# Altium PCB UNIT.PcbDoc
Units mil, origin at the board's own origin, x right, y up, seen from the top; angles counter-clockwise.
Board outline 6000 x 4000 mil, 2 copper layers (Top Layer, Bottom Layer); 58 components, 0 nets, 221 pads, 0 vias.
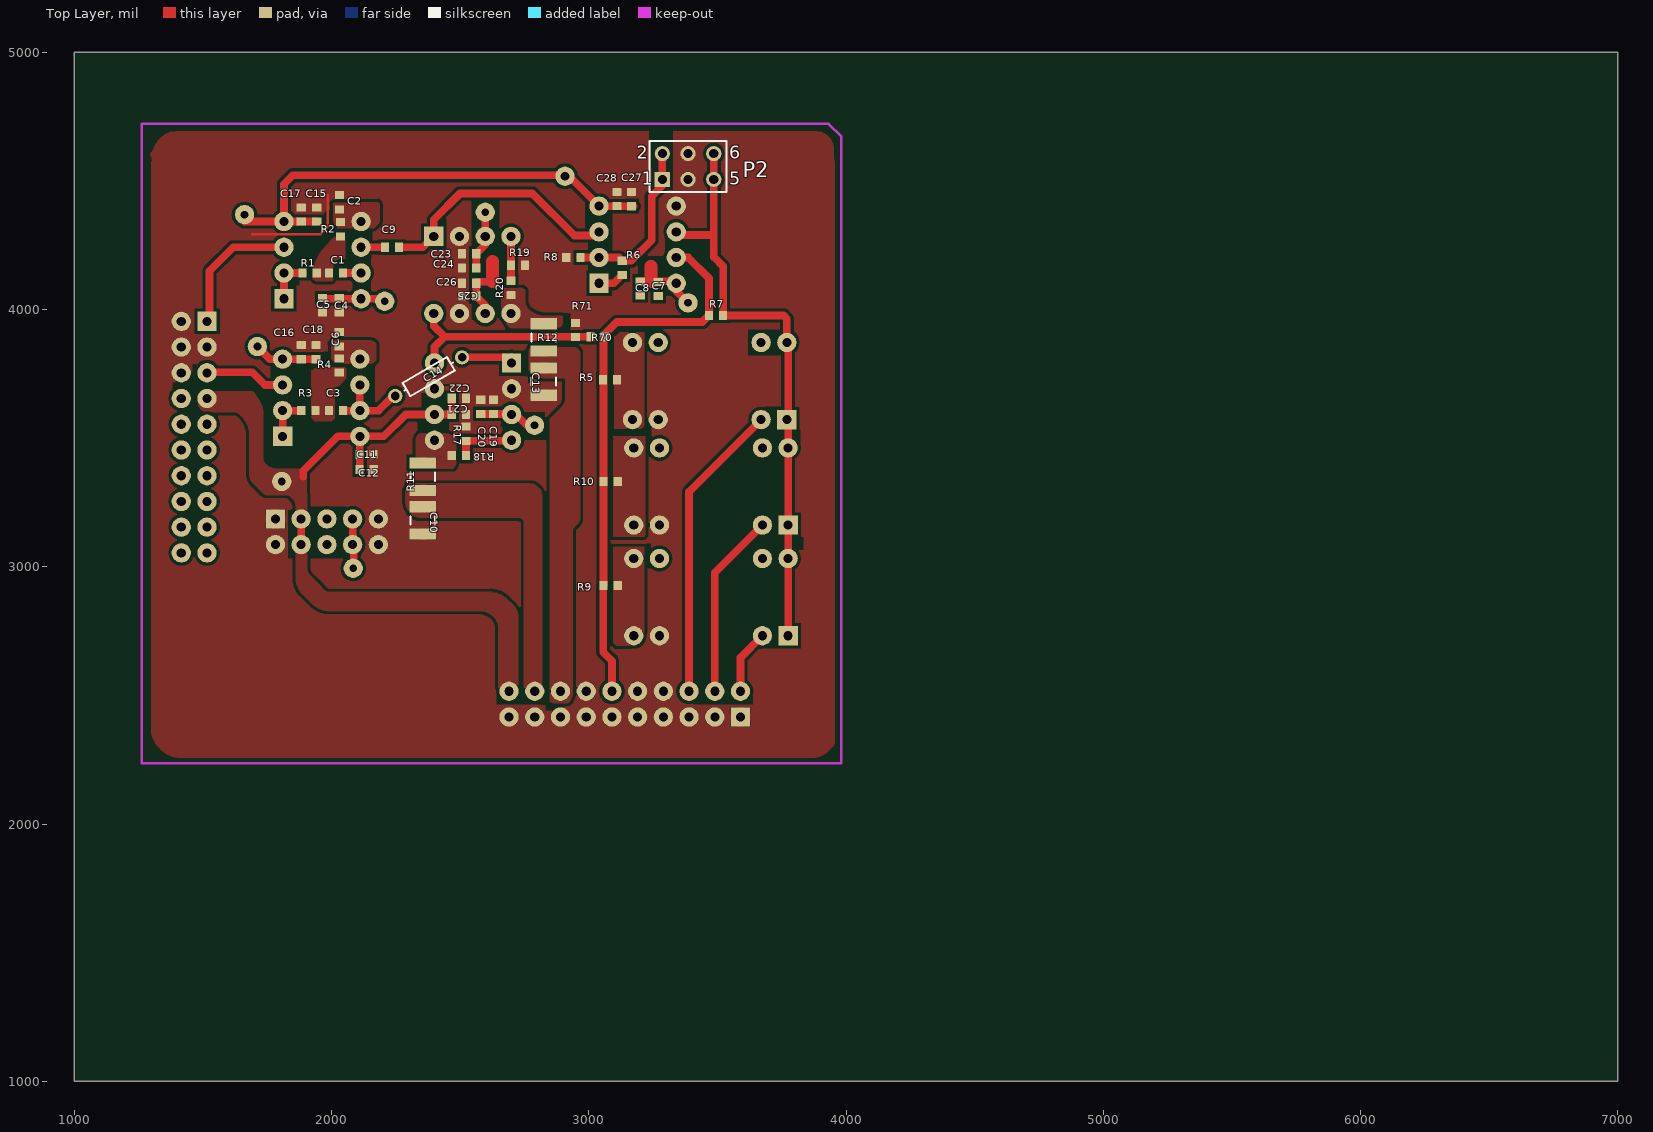
[diagram p0: Top Layer view]
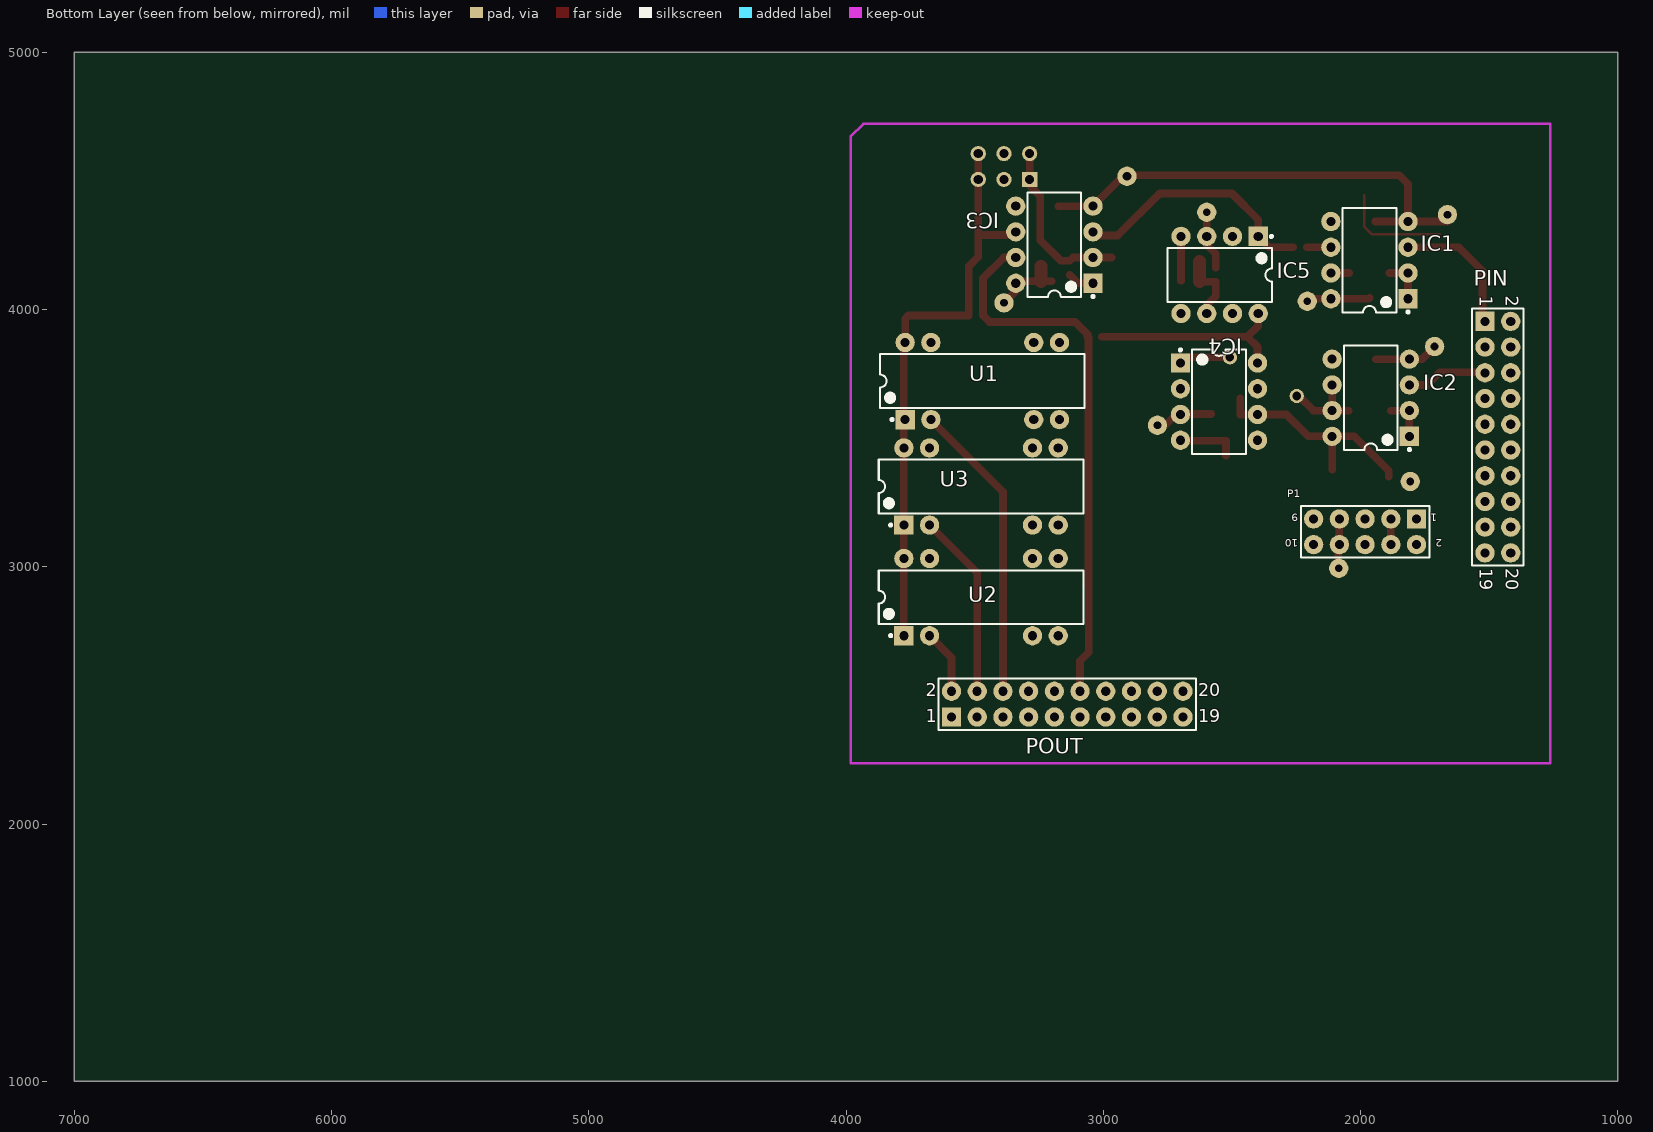
[diagram p1: Bottom Layer view, seen from below]

## Layer stack, top to bottom
Top Solder: solder mask 0.4, Solder Resist, Dk 3.5
Top Layer: signal copper 1.4
Dielectric 1: dielectric 12.6, FR-4, Dk 4.8
Bottom Layer: signal copper 1.4
Bottom Solder: solder mask 0.4, Solder Resist, Dk 3.5

## Board outline
1000,1000 7000,1000 7000,5000 1000,5000

## Design rules (kind name [scope] priority, off if disabled: settings)
Clearance [All] p1: gap=10 ignorepadtopadclearanceinfootprint=FALSE except(0: Arc-Hole Track-Hole SMDPad-Hole THPad-Hole Via-Hole Fill-Hole Poly-Hole Region-Hole Text-Hole)
PolygonConnect [All] p1: connectstyle=Relief reliefconductorwidth=10 reliefentries=4 polygonreliefangle="90 Angle" airgapwidth=10
RoutingVias [All] p1: holewidth=28 width=50 viastyle="Through Hole" minholewidth=28 minwidth=50 maxholewidth=28 maxwidth=50
SolderMaskExpansion [All] p1: expansion=4
Width [All] p1: maxlimit=10 minlimit=10 preferedwidth=10
30 further rules are at their usual default settings.

## Components (designator, comment, footprint, x,y, rotation, side; value= is the part's Value field where it differs from the comment)
C1 "Cap" 1608[0603] 2017.28,4142 r0 top value=10n
C2 "Cap" 1608[0603] 2031.25,4417 r270 top value=10n
C3 "Cap" 1608[0603] 2017.56,3607 r0 top value=10n
C4 "Cap" 1608[0603] 2030,4017 r270 top value=10nF
C5 "Cap" 1608[0603] 1965,4017 r270 top value=10uF
C6 "Cap" 1608[0603] 2030,3884.56 r270 top value=10n
C7 "Cap" 1608[0603] 3270,4079.44 r270 top value=10nF
C8 "Cap" 1608[0603] 3200,4082 r270 top value=10uF
C9 "Cap" 1608[0603] 2235,4242 r180 top value=1uF
C10 "Cap" C1210 2355.12,3180 r270 top value=1uF
C11 "Cap" 1608[0603] 2136,3436 r0 top value=10nF
C12 "Cap" 1608[0603] 2136.75,3378 r0 top value=10uF
C13 "Cap" C1210 2825,3720 r270 top value=1uF
C14 "Cap" AXIAL-0.3 2377.59,3738.96 r210 top value=1uF
C15 "Cap" 1608[0603] 1942.44,4369.44 r90 top value=10nF
C16 "Cap" 1608[0603] 1882.44,3834.44 r90 top value=10nF
C17 "Cap" 1608[0603] 1882.44,4369.44 r90 top value=10uF
C18 "Cap" 1608[0603] 1940,3834.44 r90 top value=10uF
C19 "Cap" 1608[0603] 2630,3621.84 r90 top value=10nF
C20 "Cap" 1608[0603] 2580,3621.84 r90 top value=10uF
C21 "Cap" 1608[0603] 2495,3592 r0 top value=10nF
C22 "Cap" 1608[0603] 2495,3655.31 r0 top value=10uF
C23 "Cap" 1608[0603] 2535,4217 r180 top value=10nF
C24 "Cap" 1608[0603] 2535,4162 r180 top value=10uF
C25 "Cap" 1608[0603] 2535,4052 r180 top value=10nF
C26 "Cap" 1608[0603] 2535,4102 r180 top value=10uF
C27 "Cap" 1608[0603] 3166,4428.95 r90 top value=10nF
C28 "Cap" 1608[0603] 3110,4429.44 r90 top value=10uF
IC1 "OPA2188AID" dip-8 1965,4192 r0 bottom
IC2 "OPA2188AID" dip-8 1960,3657 r0 bottom
IC3 "OPA2188AID" dip-8 3190,4252 r0 bottom
IC4 "AD835ARZ" DIP-8 2550,3642 r180 bottom
IC5 "AD835ARZ" DIP-8 2547.56,4134.44 r270 bottom
P1 "Header 5X2" HDR2X5 1782,3186 r0 bottom
P2 "Header 3X2" HDR2X3 3286,4506 r0 top
PIN "Header 10X2" HDR2X10 1516,3954 r270 bottom
POUT "Header 10X2" HDR2X10 3590,2416 r180 bottom
R1 "Res1" 1608[0603] 1914.88,4142 r0 top value=120
R2 "Res1" 1608[0603] 2035,4312 r90 top value=120
R3 "Res1" 1608[0603] 1910,3607 r0 top value=120
R4 "Res1" 1608[0603] 2030,3782 r90 top value=120
R5 "Res1" 1608[0603] 3082.56,3727 r180 top value=70
R6 "Res1" 1608[0603] 3130,4162 r270 top value=45K
R7 "Res1" 1608[0603] 3495,3977 r180 top value=500
R8 "Res1" 1608[0603] 2940,4202 r0 top value=10K
R9 "Res1" 1608[0603] 3085,2927 r180 top value=1
R10 "Res1" 1608[0603] 3085,3332 r180 top value=7
R11 "Res1" C1210 2355.12,3350.15 r270 top value=10K
R12 "Res1" C1210 2825,3891.41 r270 top value=10K
R17 "Res1" 1608[0603] 2522.44,3517 r270 top value=200
R18 "Res1" 1608[0603] 2495,3432 r180 top value=2K
R19 "Res1" 1608[0603] 2725,4172 r180 top value=200
R20 "Res1" 1608[0603] 2697.56,4084.44 r270 top value=2K
R70 "Res1" 1608[0603] 3033.56,3894 r0 top value=80K
R71 "Res1" 1608[0603] 2948,3920.81 r90 top value=20K
U1 "D1A050000" D1A050000 3770,3572 r90 bottom
U2 "D1A050000" D1A050000 3775,2732 r90 bottom
U3 "D1A050000" D1A050000 3775,3162 r90 bottom

## Footprints (in the part's own frame and the unit in brackets; to place one, negate y for a bottom-side part, rotate by r counter-clockwise, add the part's x,y. Pads: shape width x height; smd on the part's side, far side on the other; paste and mask are expansions set on the pad)
1608[0603] [mm] "Chip Capacitor, Body 1.6x0.8mm, IPC High Density"
  rect 0.8x0.9 smd: 1(-0.7,0) 2(0.7,0)
  body extent -0.87,-0.48 0.87,0.48, height 1.3
AXIAL-0.3 [mm] "Axial Device, Thru-Hole; 2 Leads; 0.3 in Pin Spacing"
  round 1.4 hole 0.85: 1(-3.81,0) 2(3.81,0)
  silkscreen extent -2.77,-0.76 2.77,0.76
C1210 [mm] "Chip Capacitor, Body 3.2x2.5mm, IPC High Density"
  rect 1.1x2.6 smd: 1(-1.35,0) 2(1.35,0)
  silkscreen extent -0.4,-1.2 0.4,1.2, body extent -1.7,-1.35 1.7,1.35, height 1.3
D1A050000 [mm]
  rect 1.905x1.905 hole 0.9: 1(0,0)
  round 1.905 hole 0.9: 2(0,-2.54) 6(0,-12.7) 7(0,-15.24) 8(7.62,-15.24) 9(7.62,-12.7) 13(7.62,-2.54) 14(7.62,0)
  silkscreen extent -0.12,-17.72 6.46,2.48, body extent 0.21,-17.72 7.41,2.48, height 5.08
dip-8 [mm] "DIP; 8 Leads; Row Spacing 7.62 mm; Pitch 2.54 mm"
  rect 1.905x1.905 hole 0.9: 1(-3.81,3.81)
  round 1.905 hole 0.9: 2(-3.81,1.27) 3(-3.81,-1.27) 4(-3.81,-3.81) 5(3.81,-3.81) 6(3.81,-1.27) 7(3.81,1.27) 8(3.81,3.81)
  silkscreen extent -3.93,-5.15 2.65,5.23, body extent -3.6,-5.15 3.6,5.15, height 5.08
DIP-8 [mm] "DIP; 8 Leads; Row Spacing 7.62 mm; Pitch 2.54 mm"
  rect 1.905x1.905 hole 0.9: 1(-3.81,3.81)
  round 1.905 hole 0.9: 2(-3.81,1.27) 3(-3.81,-1.27) 4(-3.81,-3.81) 5(3.81,-3.81) 6(3.81,-1.27) 7(3.81,1.27) 8(3.81,3.81)
  silkscreen extent -3.94,-5.15 2.65,5.23, body extent -3.6,-5.15 3.6,5.15, height 5.08
HDR2X3 [mm] "Connector; Header; 3x2 Position"
  rect 1.5x1.5 hole 0.9: 1(0,0)
  round 1.5 hole 0.9: 2(0,2.54) 3(2.54,0) 4(2.54,2.54) 5(5.08,0) 6(5.08,2.54)
  silkscreen extent -1.27,-1.27 6.35,3.81
HDR2X5 [mm] "Connector; Header; 5x2 Position"
  rect 1.905x1.905 hole 0.9: 1(0,0)
  round 1.905 hole 0.9: 2(0,2.54) 3(2.54,0) 4(2.54,2.54) 5(5.08,0) 6(5.08,2.54) 7(7.62,0) 8(7.62,2.54) 9(10.16,0) 10(10.16,2.54)
  silkscreen extent -1.27,-1.27 11.43,3.81
HDR2X10 [mm] "Connector; Header; 10x2 Position"
  rect 1.905x1.905 hole 0.9: 1(0,0)
  round 1.905 hole 0.9: 2(0,2.54) 3(2.54,0) 4(2.54,2.54) 5(5.08,0) 6(5.08,2.54) 7(7.62,0) 8(7.62,2.54) 9(10.16,0) 10(10.16,2.54) 11(12.7,0) 12(12.7,2.54) 13(15.24,0) 14(15.24,2.54) 15(17.78,0) 16(17.78,2.54) 17(20.32,0) 18(20.32,2.54) 19(22.86,0) 20(22.86,2.54)
  silkscreen extent -1.27,-1.27 24.13,3.81

## Part data
C1 C2 C3 C4 C5 C6 C7 C8 C9 C10 C11 C12 C13 C14 C15 C16 C17 C18 C19 C20 C21 C22 C23 C24 C25 C26 C27 C28: "Capacitor", LatestRevisionDate=17-Jul-2002, LatestRevisionNote="Re-released for DXP Platform.", PackageDescription="Radial Cap, Thru-Hole; 2 Leads; 0.3 in Pin Spacing", PackageReference=RAD-0.3, Published=8-Jun-2000, Publisher="Altium Limited"
IC1 IC2 IC3: "Integrated Circuit", Manufacturer_Name="Texas Instruments", Mouser Part Number=595-OPA2188AID, RS Part Number=8122568P, Datasheet Link=http://www.ti.com/lit/ds/symlink/opa2188.pdf, Height=1.75mm, Manufacturer_Part_Number=OPA2188AID, Mouser Price/Stock=https://www.mouser.com/Search/Refine.aspx?Keyword=595-OPA2188AID, RS Price/Stock=http://uk.rs-online.com/web/p/products/8122568P
IC4 IC5: "Integrated Circuit", Manufacturer_Name="Analog Devices", Mouser Part Number=584-AD835ARZ, RS Part Number=5236973, Datasheet Link=http://www.analog.com/static/imported-files/data_sheets/AD835.pdf, Height=1.75mm, Manufacturer_Part_Number=AD835ARZ, Mouser Price/Stock=https://www.mouser.com/Search/Refine.aspx?Keyword=584-AD835ARZ, RS Price/Stock=https://uk.rs-online.com/web/p/products/5236973
P1: "Header, 5-Pin, Dual row", LatestRevisionDate=17-Jul-2002, LatestRevisionNote="Re-released for DXP Platform.", Publisher="Altium Limited"
P2: "Header, 3-Pin, Dual row", LatestRevisionDate=17-Jul-2002, LatestRevisionNote="Re-released for DXP Platform.", Publisher="Altium Limited"
PIN POUT: "Header, 10-Pin, Dual row", LatestRevisionDate=17-Jul-2002, LatestRevisionNote="Re-released for DXP Platform.", Publisher="Altium Limited"
R1 R2 R3 R4 R5 R6 R7 R8 R9 R10 R11 R12 R17 R18 R19 R20 R70 R71: "Resistor", LatestRevisionDate=17-Jul-2002, LatestRevisionNote="Re-released for DXP Platform.", PackageDescription="Axial Device, Thru-Hole; 2 Leads; 0.3 in Pin Spacing", PackageReference=AXIAL-0.3, Published=8-Jun-2000, Publisher="Altium Limited"

## Free pads (board coordinates)
  round 75 hole 30: 2(1662,4368.75) 3(1711.8,3856) 4(3386,4026) 5(2206.67,4032) 6(2597.56,4378.02) 7(2789.35,3550) 9(2084.21,2994) 10(1806.54,3331.67)
  round 75 hole 33.46: 11(2907.8,4518)

## Nets (pads, with @x,y where several pads share a name; then routed paths per layer and width w, separated by ;. In a path a pad name is that pad's centre, name@x,y a point inside that pad or via, vN(x,y) a via of type N, cw(c..) or ccw(c..) an arc to the next point about the centre after c; other vN are vias at no path point)
pads on no net: C1.1 C1.2 C2.1 C2.2 C3.1 C3.2 C4.1 C4.2 C5.1 C5.2 C6.1 C6.2 C7.1 C7.2 C8.1 C8.2 C9.1 C9.2 C10.1 C10.2 C11.1 C11.2 C12.1 C12.2 C13.1 C13.2 C14.1 C14.2 C15.1 C15.2 C16.1 C16.2 C17.1 C17.2 C18.1 C18.2 C19.1 C19.2 C20.1 C20.2 C21.1 C21.2 C22.1 C22.2 C23.1 C23.2 C24.1 C24.2 C25.1 C25.2 C26.1 C26.2 C27.1 C27.2 C28.1 C28.2 IC1.1 IC1.2 IC1.3 IC1.4 IC1.5 IC1.6 IC1.7 IC1.8 IC2.1 IC2.2 IC2.3 IC2.4 IC2.5 IC2.6 IC2.7 IC2.8 IC3.1 IC3.2 IC3.3 IC3.4 IC3.5 IC3.6 IC3.7 IC3.8 IC4.1 IC4.2 IC4.3 IC4.4 IC4.5 IC4.6 IC4.7 IC4.8 IC5.1 IC5.2 IC5.3 IC5.4 IC5.5 IC5.6 IC5.7 IC5.8 P1.1 P1.2 P1.3 P1.4 P1.5 P1.6 P1.7 P1.8 P1.9 P1.10 P2.1 P2.2 P2.3 P2.4 P2.5 P2.6 PIN.1 PIN.2 PIN.3 PIN.4 PIN.5 PIN.6 PIN.7 PIN.8 PIN.9 PIN.10 PIN.11 PIN.12 PIN.13 PIN.14 PIN.15 PIN.16 PIN.17 PIN.18 PIN.19 PIN.20 POUT.1 POUT.2 POUT.3 POUT.4 POUT.5 POUT.6 POUT.7 POUT.8 POUT.9 POUT.10 POUT.11 POUT.12 POUT.13 POUT.14 POUT.15 POUT.16 POUT.17 POUT.18 POUT.19 POUT.20 R1.1 R1.2 R2.1 R2.2 R3.1 R3.2 R4.1 R4.2 R5.1 R5.2 R6.1 R6.2 R7.1 R7.2 R8.1 R8.2 R9.1 R9.2 R10.1 R10.2 R11.1 R11.2 R12.1 R12.2 R17.1 R17.2 R18.1 R18.2 R19.1 R19.2 R20.1 R20.2 R70.1 R70.2 R71.1 R71.2 U1.1 U1.2 U1.6 U1.7 U1.8 U1.9 U1.13 U1.14 U2.1 U2.2 U2.6 U2.7 U2.8 U2.9 U2.13 U2.14 U3.1 U3.2 U3.6 U3.7 U3.8 U3.9 U3.13 U3.14
copper on no net: | length 16420.4
  Top Layer w10: 1691.37,4292 1955.82,4292 1986,4322.18 1986,4444
  Top Layer w30: 1516,3754 1518,3756 1692,3756 1741,3707 1810,3707 ; 1516,3954 1526,3964 1526,4150 1618,4242 1815,4242 ; 1662,4368.75 1662,4342 1815,4342 ; 1711.8,3856 1760.8,3807 1810,3807 1810.12,3806.88 1882.44,3806.88 1940,3806.88 ; 1810,3507 1810,3607 1882.44,3607 ; 1815,4042 1815,4142 1887.32,4142 ; 1882,3086 1882,3186 ; 1890,3350.58 1890,3372.54 2024.46,3507 2110,3507 ; 1942.44,4341.88 1942.32,4342 1815,4342 ; 1965,4044.56 1967.56,4042 2115,4042 2206.67,4042 2206.67,4032 ; 2044.84,4142 2115,4142 ; 2045.12,3607 2110,3607 ; 2082,3186 2082,3086 2088,3086 2084.21,2994 ; 2109.19,3378 2110,3378.81 2110,3507 ; 2110,3707 2110,3607 ; 2115,4242 2207.44,4242 ; 2247.69,3663.96 2239.56,3663.96 2182.3,3606.71 2110,3606.71 2110,3607 ; 2262.56,4242 2355.12,4242 2397.56,4284.44 2397.56,4349.42 2499.34,4451.2 2780.28,4451.2 2943.48,4288 3026,4288 3040,4302 ; 2397.56,3794.44 2400,3792 ; 2397.56,3984.44 2397.56,3936.08 2439.64,3894 ; 2400,3833 2400,3854.36 2439.64,3894 ; 2467.44,3655.31 2467.44,3592 2400,3592 2288,3592 2203,3507 2110,3507 ; 2507.49,3813.96 2678.04,3813.96 2700,3792 2700,3816.5 ; 2522.56,3432 2522.44,3432.12 2522.44,3489.44 2700,3489.44 2700,3492 ; 2562.56,4162 2562.56,4217 2597.56,4252 2597.56,4284.44 2597.56,4378.02 ; 2580,3594.28 2630,3594.28 2714.78,3594.28 2759.06,3550 2789.35,3550 ; 2597.56,3984.44 2597.56,4017 2562.56,4052 2562.56,4102 2562.56,4108.32 2626,4108.32 ; 2697.56,4112 2697.56,4171.88 2697.44,4172 2697.44,4284.32 2697.56,4284.44 ; 2967.56,4202 3117.56,4202 3130,4189.56 3164.09,4189.56 3244.53,4270 3244.53,4440.64 3286,4482.11 3286,4506 3286,4606 ; 3006,3894 2439.64,3894 ; 3040,4102 3097.56,4102 3130,4134.44 ; 3057.44,3892 3057.44,3332 3057.44,2927 3056,2927 3056,2668 3090,2634 3090,2516 ; 3061.12,3894 3061.12,3903.8 3108.76,3951.44 3441.88,3951.44 3467.44,3977 3467.44,4121.84 3387.28,4202 3340,4202 ; 3175,4401.88 3174.88,4402 3040,4402 2920,4522 1850,4522 1815,4487 1815,4342 ; 3200,4109.56 3242,4109.56 3332.44,4109.56 3340,4102 3340,4072 3386,4026 ; 3340,4302 3340,4290 3486,4290 ; 3390,2516 3390,3292 3670,3572 ; 3486,4606 3486,4506 3486,4290 ; 3490,2516 3490,2977 3675,3162 ; 3590,2516 3590,2647 3675,2732 ; 3775,2732 3775,3032 3775,3162 3775,3462 3775,3872 3770,3872 3770,3964 3757,3977 3522.56,3977 3522.56,4167.46 3487.3,4202.72 3486,4202.72 3486,4290
  Top Layer w50: 2626,4108.32 2626,4187 ; 3242,4109.56 3242,4168

## Polygon pours and split planes (outlines as drawn)
no net on Top Layer (solid, remove dead copper, pour order 294): 3100,3537 3205,3537 3215,3547 3215,3912 3120,3912 3105,3897 3100,3897
no net on Top Layer (solid, pour order 292): 3100,3497 3095,3492 3095,3117 3215,3117 3220,3123 3220,3152 3220,3507 3100,3507 3095,3507 3095,3487
no net on Top Layer (solid, pour order 290): 3095,3077 3095,2703.81 3106.81,2692 3216,2692 3216,3077
no net on Top Layer (solid, pour order 288): 2010,4328
no net on Top Layer (solid, pour order 286): 2006,4406 2006,4351.8 ccw(c2053.8,4351.8) 2020,4318 ccw(c2024.83,4322.83) 2024.83,4316 2158,4316 ccw(c2158,4335.31) 2171.66,4321.66 2180,4330 ccw(c2160.69,4349.31) 2188,4349.31 2188,4406.34 ccw(c2174.34,4406.34) 2184,4416 ccw(c2179.17,4411.17) 2179.17,4418 2012.28,4418 ccw(c2012.28,4412.49) 2008.39,4416.39 2004,4412 cw(c2002.25,4410.25) 2004.72,4410.25 2004.72,4401.88
no net on Top Layer (solid, pour order 284): 1942.44,4109.56 cw(c1942.44,4124.04) 1932.2,4113.8 1920,4126 cw(c1924.83,4130.83) 1918,4130.83 cw(c2187.38,4068.16) 2027.73,4294 2053.07,4294 2053.07,4198 2039.99,4198 ccw(c2039.99,4150.22) 2006.19,4184 2006.19,4120.12 cw(c1991.89,4120.12) 2002,4110 1940,4110
no net on Top Layer (solid, pour order 282): 1998,3818 ccw(c2027.77,3818) 2006.72,3796.95 2009.67,3794 ccw(c2019.32,3803.66) 2019.32,3790 2154,3790 ccw(c2154,3809.31) 2167.66,3795.66 2174,3802 2174,3863.1 ccw(c2161.41,3863.1) 2170.31,3872 ccw(c2151,3852.69) 2151,3880 2009.64,3880 ccw(c2009.64,3876.04) 2006.84,3878.84 1996,3868 cw(c1991.17,3863.17) 1998,3863.17
no net on Top Layer (solid, pour order 280): 1919.72,3652 1919.72,3593.66 ccw(c1953.18,3593.66) 1929.52,3570 ccw(c1939.18,3579.66) 1939.18,3566 1997.48,3566 ccw(c1997.48,3575.37) 2004.11,3568.74 2011.36,3576 ccw(c2009.14,3578.23) 2012.28,3578.23 2012.28,3698 ccw(c2012.28,3726.29) 2032.28,3706.28 2058,3732 2058,3766 ccw(c2048.34,3766) 2055.17,3772.83 2052,3776 1958.35,3776 ccw(c1958.35,3721.37) 1919.72,3760 cw(c1917.66,3757.94) 1920.57,3757.94 1920.57,3590
no net on Top Layer (solid, pour order 278): 2660,4068 2660,4003.42 ccw(c2760,4003.42) 2689.29,3932.71 2692,3930 ccw(c2696.83,3934.83) 2696.83,3928 2878,3928 ccw(c2878,3947.31) 2891.66,3933.66 2896,3938 ccw(c2891.17,3942.83) 2898,3942.83 2898,3976 2831.6,3976 cw(c2831.6,4071.6) 2764,4004 cw(c2788.14,4028.14) 2754,4028.14 2754,4073.17 ccw(c2747.17,4073.17) 2752,4078 ccw(c2737.51,4063.51) 2737.51,4084 2672,4084 cw(c2662.34,4084) 2669.17,4077.17
no net on Top Layer (solid, pour order 276): 2355.31,3382 cw(c2355.31,3409.31) 2336,3390 cw(c2355.31,3409.31) 2328,3409.31 2328,3494.69 cw(c2355.31,3494.69) 2336,3514 cw(c2350.49,3499.51) 2350.49,3520 2434.17,3520 cw(c2434.17,3446.71) 2486,3498.53 ccw(c2490.83,3493.7) 2484,3493.7 2484,3403.31 cw(c2456.69,3403.31) 2476,3384 cw(c2471.17,3388.83) 2471.17,3382
no net on Top Layer (solid, pour order 274): 2286,3261.94 ccw(c2367.94,3261.94) 2310,3204 ccw(c2343.8,3237.8) 2343.8,3190 2722,3190 cw(c2722,3157.76) 2744.8,3180.56 2745.35,3180 cw(c2738.97,3173.61) 2748,3173.61 2748,2530 ccw(c2809.97,2530) 2766.15,2486.18 2780,2472.33 2814,2472.33 ccw(c2814,2482.79) 2821.39,2475.39 2828,2482 cw(c2847.31,2501.31) 2820,2501.31 2820,3274.2 ccw(c2772.2,3274.2) 2806,3308 ccw(c2767.37,3269.37) 2767.37,3324 2296,3324 2296,3322.14 cw(c2261.86,3322.14) 2286,3298
no net on Top Layer (solid, pour order 272): 1474,3678 1474,3661.11 ccw(c1549.11,3661.11) 1496,3608 ccw(c1515.31,3627.31) 1515.31,3600 1626,3600 cw(c1626,3580.7) 1639.66,3594.34 1652,3582 cw(c1584.41,3514.4) 1680,3514.4 1680,3362 ccw(c1737.94,3362) 1696.97,3321.03 1732,3286 ccw(c1749.12,3303.12) 1749.12,3278.91 1824,3278.91 cw(c1824.01,3256.97) 1839.52,3272.48 1848,3264 cw(c1819.04,3235.03) 1860,3235.03 1860,2958 ccw(c1951.74,2958) 1886.87,2893.13 1922.71,2857.29 ccw(c1993.42,2928) 1993.42,2828 2576,2828 cw(c2576.01,2755.59) 2627.21,2806.79 2632,2802 cw(c2593.39,2763.38) 2648,2763.37 2648,2522.26 ccw(c2711.39,2522.26) 2666.57,2477.43 2668,2476 ccw(c2682.49,2490.49) 2682.49,2470 2714,2470 ccw(c2714,2484.49) 2724.24,2474.24 2726,2476 2726,2804 ccw(c2658.42,2804.01) 2706.2,2851.8 2685.29,2872.71 ccw(c2614.59,2802.02) 2614.58,2902 1989.72,2902 cw(c1989.72,2920.65) 1976.54,2907.46 1916,2968 cw(c1940.15,2992.14) 1906,2992.14 1906,3268 ccw(c1828.76,3268.01) 1883.37,3322.63 1865.29,3340.71 ccw(c1794.59,3270.02) 1794.58,3370 1740,3370 cw(c1740,3379.66) 1733.17,3372.83 cw(c1779.46,3419.11) 1714,3419.11 1714,3639.37 ccw(c1659.39,3639.38) 1698,3678 ccw(c1688.36,3668.38) 1688.34,3682 1472,3682
no net on Top Layer (solid, pour order 270): 1688.35,3682 1705.26,3665.08 cw(c1636.17,3596) 1733.87,3596 1733.87,3424.45 ccw(c1768.45,3424.45) 1744,3400 ccw(c1787.46,3443.46) 1787.46,3382 1894,3382 cw(c1894,3371.97) 1904.03,3371.95 1903.84,3262 1895.07,3262 cw(c1895.07,3322.91) 1852,3279.84 1838.99,3292.85 ccw(c1768.28,3222.15) 1768.28,3322.14 1733.87,3322.14 cw(c1733.87,3336.67) 1723.6,3326.4 1700,3350 cw(c1728.14,3378.14) 1688.35,3378.14
no net on Top Layer (solid, pour order 268): 2908,3732 2832.67,3732 cw(c2832.67,3823.46) 2768,3758.79 cw(c2772.83,3763.62) 2766,3763.62 2766,3838.26 cw(c2787.1,3838.26) 2772.18,3853.18 2776,3857 ccw(c2783.24,3864.24) 2783.24,3854 2940.69,3854 cw(c2940.69,3826.69) 2960,3846 cw(c2945.52,3831.52) 2966,3831.51 2966,3186 cw(c2941.87,3186) 2958.93,3168.93 2944,3154 ccw(c2958.48,3139.52) 2938,3139.51 2938,2510.63 cw(c2883.39,2510.62) 2922,2472 cw(c2917.18,2476.8) 2917.17,2470 2862.49,2470 cw(c2862.48,2490.48) 2848,2476 2848,3576 2896,3624 ccw(c2867.03,3652.97) 2908,3652.97
no net on Top Layer (solid, remove dead copper, pour order 266): 1304.82,4578 1302,4576 ccw(c1299.59,4577) 1302,4578 1300,4578 1300,2362 ccw(c1386.91,2362) 1325.46,2300.54 1338.71,2287.29 ccw(c1409.42,2358) 1409.42,2258 3872,2258 ccw(c3872,2340.08) 3930.04,2282.04 3950,2302 ccw(c3935.52,2316.48) 3956,2316.49 3956,4563.23 ccw(c3867.24,4563.23) 3930,4626 ccw(c3862.4,4558.41) 3862.4,4654 1364,4654 ccw(c1363.99,4600.91) 1326.44,4638.44 1300,4612 ccw(c1309.65,4602.34) 1302,4591.04 1302,4577.36
no net on Top Layer (solid, pour order 264): 1303.41,4590 1303.41,4594 cw(c1403.41,4594) 1403.41,4694 3880.59,4694 cw(c3880.59,4622) 3952.59,4622 3952.59,4589.41 ccw(c3960,4589.41) 3960,4582 1310.22,4582 cw(c1310.22,4592.75) 1299.47,4592.75

## Keep-outs
Keep-Out Layer:
  lines w10: 1262,2236 1262,4722 3932,4722 3982,4672 3982,4602 3982,4590 3982,4548 3982,2236 1262,2236

## Other copper
Top Layer:
  pour cut-out: 2984,4416 2984,4315.18 3060,4315.18 3060,4268.03 2995.89,4268.03 2995.89,4152.5 3092.28,4152.5 3092.28,4417.48 2988,4417.48 2988,4419.49
  pour cut-out: 3295.89,4276.53 3295.89,4051.88 3385.24,4051.88 3385.24,4072.63 3402,4072.63 3402,4278 3288,4278
  pour cut-out: 3618,3924 3618,3820 3741.76,3820 3741.76,3924
  pour cut-out: 3205,3537 3210,3537 3210,3502.65 3244.53,3502.65 3244.53,3566.53 3205,3566.53
  pour cut-out: 3683.18,3622.5 3740,3622.5 3740,3598 3683.18,3598
  pour cut-out: 3803.24,3528 3803.24,3480 3824.2,3480 3824.2,3534 3804,3534 3804,3530
  pour cut-out: 3797.28,3112 3797.28,3064.76 3836,3064.76 3836,3116.27 3803.24,3116.27 3803.24,3111.5
  pour cut-out: 3225.37,3086.37 3225.37,2992 3242.24,2992 3242.24,3089.4 3221.07,3089.4 3221.07,3089.25
  pour cut-out: 3668,2678.75 3668,2681.5 3724.5,2681.5 3724.5,2710 3665.28,2710 3665.28,2682.34
  pour cut-out: 2640.8,2502.82 2640.8,2462.63 2871.09,2462.63 2871.09,2456.75 2844,2456.75 2844,2502.82 2645.89,2502.82 2645.89,2490.53
  pour cut-out: 1919.24,3051.58 1919.24,3032 2060,3032 2060,3070 1922.56,3070 1922.56,3052.45 1924,3052.45
  pour cut-out: 1916.95,3228 1921.62,3228 1921.62,3204.91 2056,3204.91 2056,3236 1918.08,3236 1918.08,3226
  pour cut-out: 1829.74,3217.72 1829.74,3032 1855.16,3032 1855.16,3221.15 1831.06,3221.15 1831.06,3218.72
  pour cut-out: 1474,3714 1474,3718 1379.98,3718 1379.98,3662.89 1498.72,3662.89 1498.72,3722 1479.98,3722 1479.98,3717.98
  pour cut-out: 1541.47,3709.89 1541.47,3694.83 1562,3694.83 1562,3727.76 1542,3727.76 1542,3704.94
  pour cut-out: 1768.02,3678.76 1768.02,3557.5 1794,3557.5 1794,3676.77 1773.98,3676.77 1773.98,3679.72
  pour cut-out: 2333.42,3562 2333.42,3529.19 2458.14,3529.19 2458.14,3559.71 2346,3559.71 2346,3563.76
  pour cut-out: 2436.53,3682.21 2436.53,3677 2349.06,3677 2349.06,3621.24 2441.25,3621.24 2441.25,3681.14
  pour cut-out: 2432.76,3710.91 2432.76,3711.3 2508,3711.3 2508,3701.79 2429.62,3701.79 2429.62,3712
  pour cut-out: 2663.98,3555.98 2663.98,3522.68 2747.22,3522.68 2747.22,3556.47 2656.65,3556.47 2656.65,3536.11 2656,3536.11
  pour cut-out: 2159.9,4302.75 2159.9,4270.24 2132.79,4270.24 2132.79,4294.71 2142.76,4294.71 2142.76,4303.74 2156,4303.74
  pour cut-out: 2156.98,4213.76 2153.69,4213.76 2153.69,4078.96 2080.62,4078.96 2080.62,4197.77 2156.98,4197.77
  pour cut-out: 2544,4018.82 2544,3958.97 2558.34,3958.97 2558.34,4023.13 2542,4023.13
  pour cut-out: 3408,2462.63 3639.2,2462.63 3639.2,2494 3408,2494
  pour cut-out: 2126,3767.18 2130,3767.18 2130,3633.39 2170.31,3633.39 2170.31,3776.75 2133.41,3776.75
  pour cut-out: 2900,3987.29 2901.99,3987.29 2901.99,3920 2930,3920 2930,3988.25 2903.07,3988.25
  pour cut-out: 1458,3720 1471.89,3720 1471.89,3790.02 1458,3790.02
  pour cut-out: 1843.42,4108 1843.42,4092.5 1877.3,4092.5 1877.3,4113 1848,4113 1848,4110.36
  pour cut-out: 2428.34,4334.94 2448.06,4334.94 2448.06,4352 2432.09,4352 2432.09,4353.57 2428.34,4353.57
  pour cut-out: 2550.17,4419.49 2544,4419.49 2544,4330.22 2572,4330.22 2572,4422.96 2546,4422.96
  pour cut-out: 2625.8,4422.96 2625.8,4302.23 2654,4302.23 2654,4422.96
  pour cut-out: 2752,3752.64 2752,3738.5 2766.74,3738.5 2766.74,3752.64
  pour cut-out: 2762.57,3738.5 2762.57,3714 2783.19,3714 2783.19,3738.5
  pour cut-out: 2745.73,3513.57 2745.73,3492 2832,3492 2832,3517.99 2753.33,3517.99 2753.33,3513.98
  pour cut-out: 2830,2462 2830,2440 2880,2440 2880,2451.75 2844,2451.75 2844,2462.26 2820.4,2462.26 2820.4,2462
  pour cut-out: 1970.72,3789.25 1986,3789.25 1986,3836.95 1970.72,3836.95
  pour cut-out: 1760.8,3734 1790.54,3734 1790.54,3780.46 1760.8,3780.46
  pour cut-out: 2750.02,3598.98 2750.02,3586 2830.35,3586 2830.35,3602 2753.38,3602
  pour cut-out: 2544,4330.22 2544,4248.42 2567.75,4248.42 2567.75,4330.22
  pour cut-out: 3238,4654 3238,4548.89 3328.53,4548.89 3328.53,4652 3236,4652
  pour cut-out: 3190,4210.27 3190,4140.75 3286,4140.75 3286,4210 3192,4210
  pour cut-out: 3233.98,4698 3233.98,4654 3326.53,4654 cw(c3326.53,4652) 3328.53,4652 3328.53,4692.53 cw(c3332,4692.53) 3332,4696 3236,4696
Bottom Layer:
  pour cut-out: 1398.21,3626.98 1398.21,3297.56 1300,3297.56

## Text inside footprints (layer, text, board x,y; h text height)
P1: Bottom Overlay "10" at 2242,3106 h30 r180; Bottom Overlay "9" at 2242,3206 h30 r180; Bottom Overlay "1" at 1702,3206 h30 r180; Bottom Overlay "2" at 1682,3106 h30 r180
P2: Top Overlay "6" at 3546,4586 h50; Top Overlay "5" at 3546,4486 h50; Top Overlay "2" at 3186,4586 h50; Top Overlay "1" at 3206,4486 h50
PIN: Bottom Overlay "20" at 1436,2994 h50 r90; Bottom Overlay "19" at 1536,2994 h50 r90; Bottom Overlay "1" at 1536,4054 h50 r90; Bottom Overlay "2" at 1436,4054 h50 r90
POUT: Bottom Overlay "20" at 2630,2496 h50; Bottom Overlay "19" at 2630,2396 h50; Bottom Overlay "1" at 3690,2396 h50; Bottom Overlay "2" at 3690,2496 h50